# Altium PCB PCB1.PcbDoc (part 5 of 7)
Units mm, origin at the board's own origin, x right, y up, seen from the top; angles counter-clockwise.
Board outline 100 x 100 mm, 6 copper layers (Top, GND_1, Signal, PWR, GND_2, Bottom), stack 0.816 mm thick; 321 components, 260 nets, 1718 pads, 694 vias.
Unrouted connection lines stored in the file: 527.
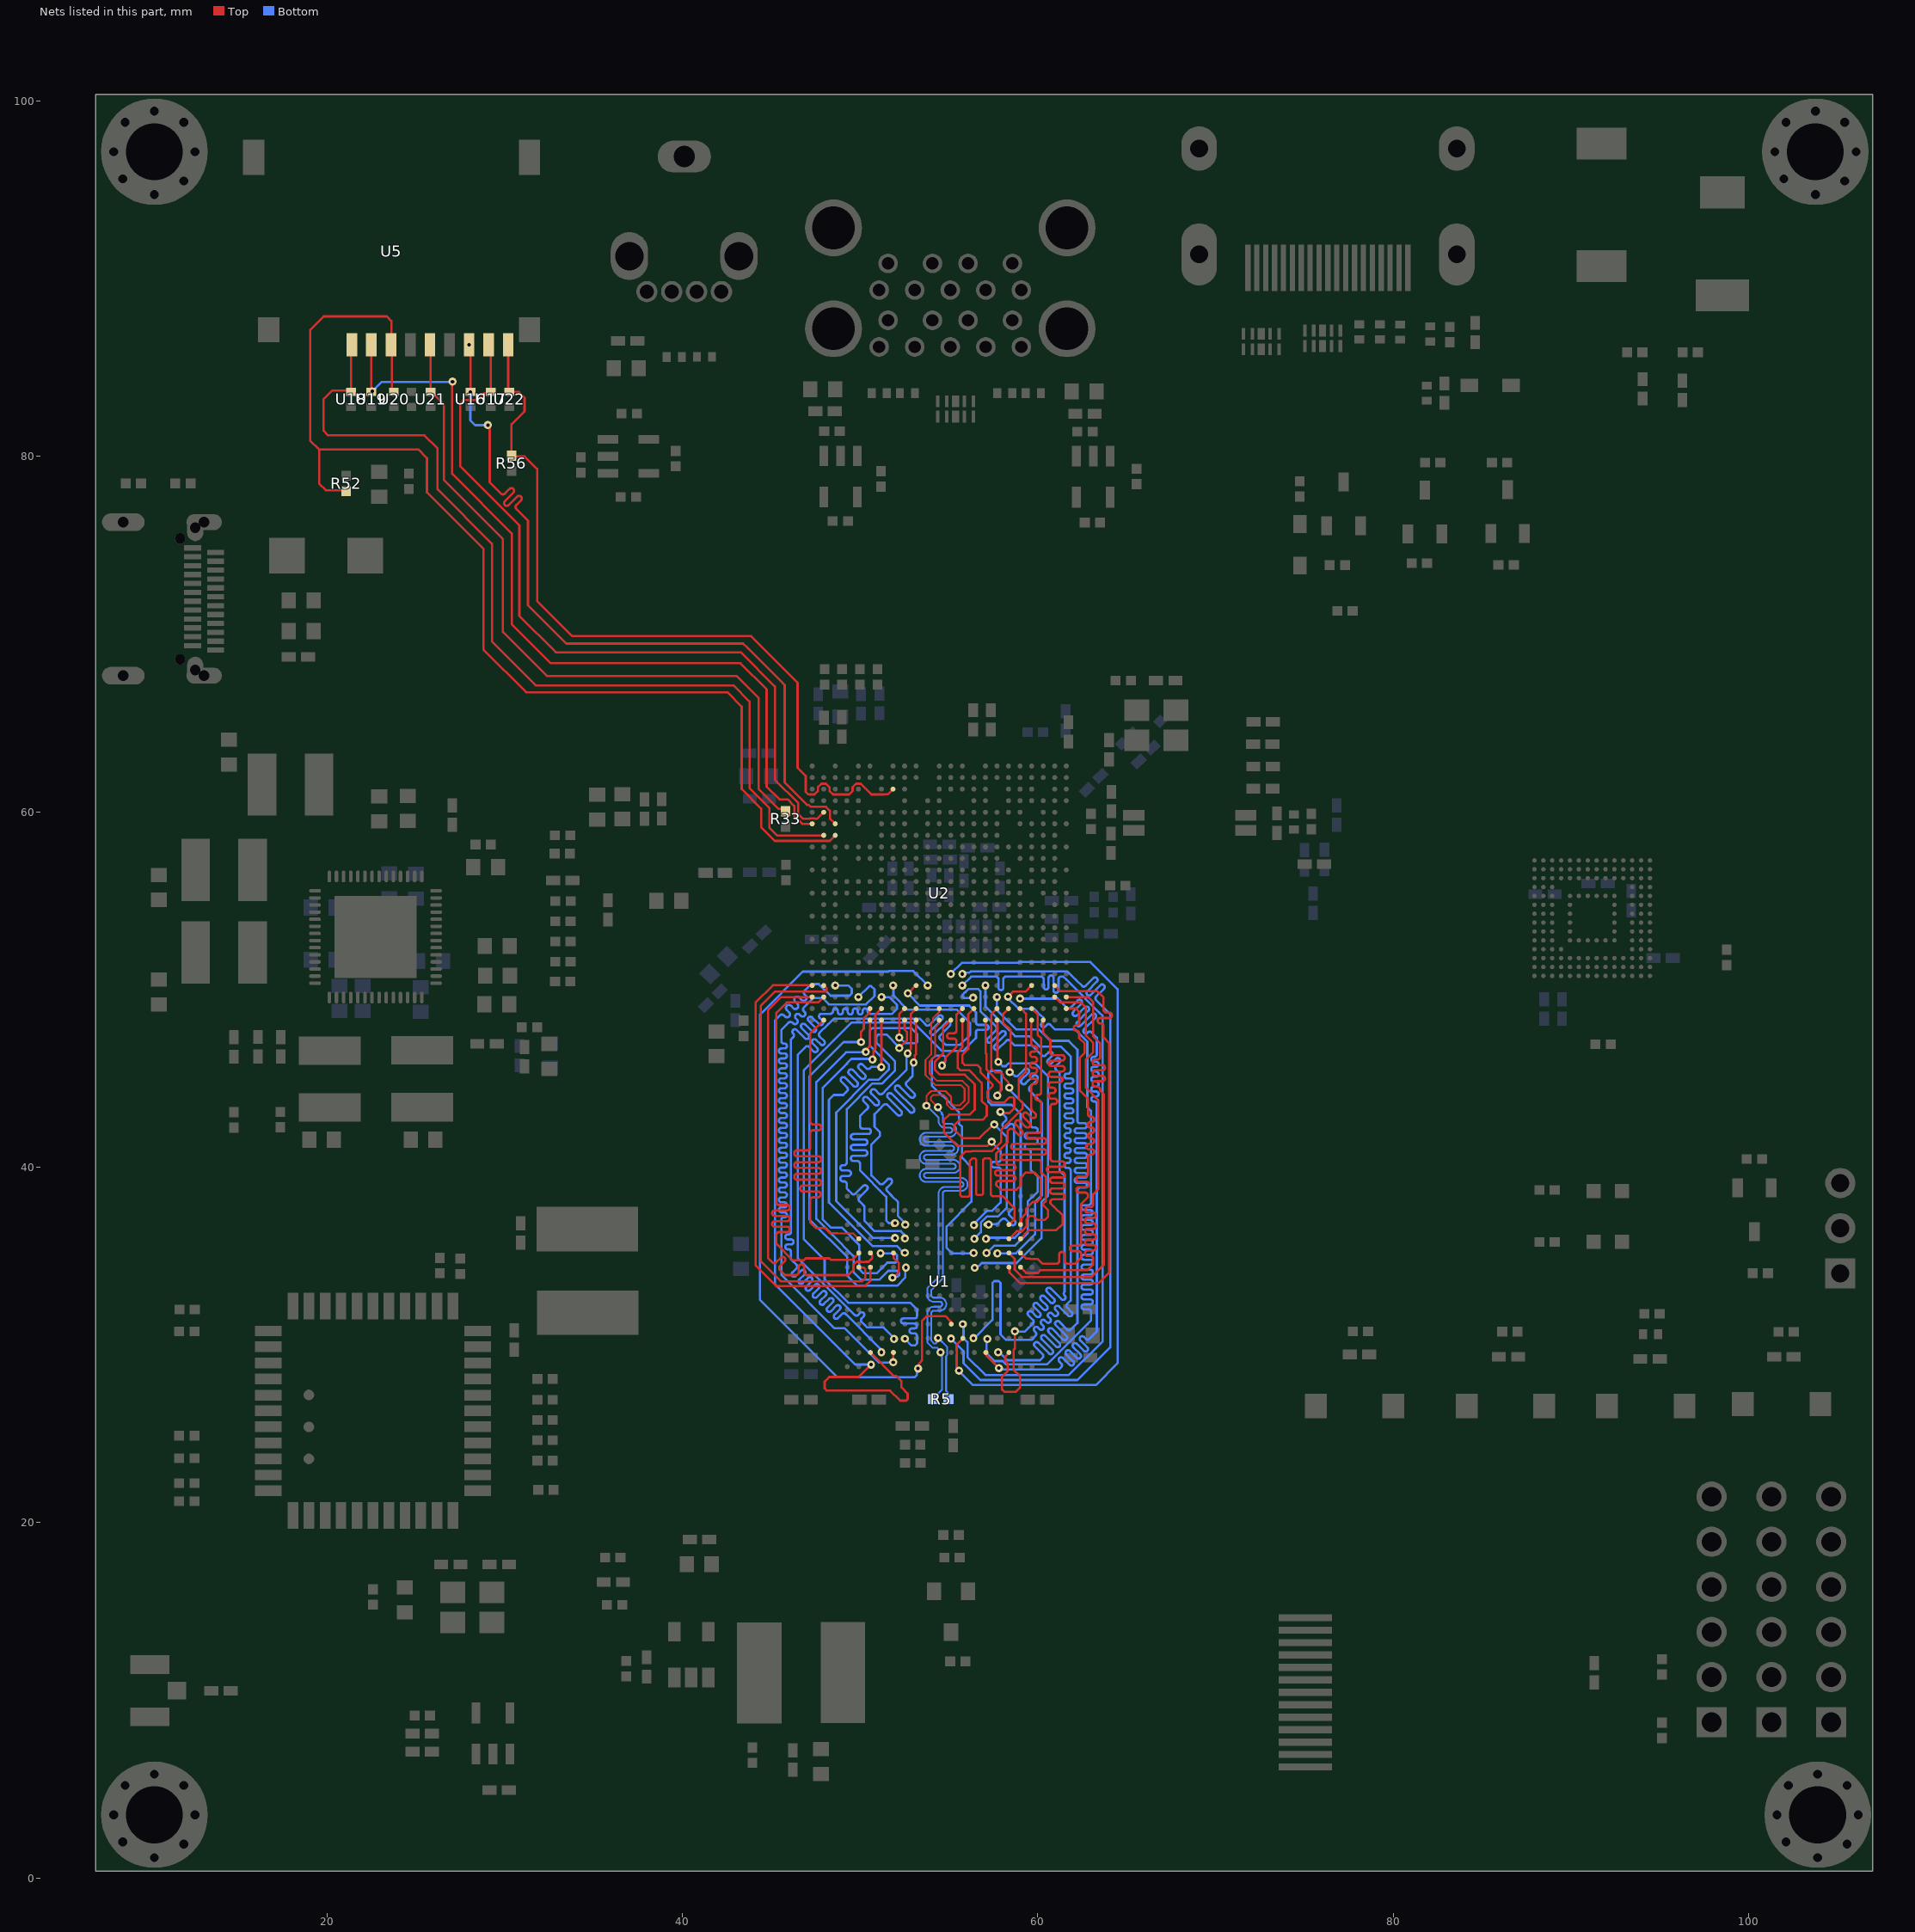
[diagram p8: the nets of this part, all layers, seen from the top]

## Via types
v1: diameter 0.457, hole 0.203, Top to Bottom, tented both sides, 685 vias
v2: diameter 0.61, hole 0.305, Top to Bottom, tented both sides, 9 vias

## Nets (pads, with @x,y where several pads share a name; then routed paths per layer and width w, separated by ;. In a path a pad name is that pad's centre, name@x,y a point inside that pad or via, vN(x,y) a via of type N, cw(c..) or ccw(c..) an arc to the next point about the centre after c; other vN are vias at no path point) (continued)
SA0: U1.R2 U2.AA15 | length 42.9
  Top w0.127: U1.R2@58.377,29.575 58.377,29.548 58.166,29.337 58.166,29.083 58.293,28.956 58.293,28.52 57.991,28.218 57.991,27.498 58.122,27.366 58.768,27.366 59.008,27.606 59.008,28.241 58.631,28.618 58.631,29.713 58.711,29.793 v1@58.711,30.766
  Bottom w0.127: v1(56.356,49.538) 56.348,49.53 55.841,49.53 55.767,49.604 55.767,49.71 55.897,49.84 55.915,49.84 56.113,50.038 56.642,50.038 56.769,49.911 56.769,48.796 57.011,48.554 57.056,48.509 57.649,47.916 cw(c57.55,47.817) 57.649,47.719 57.174,47.244 ccw(c57.273,47.145) 57.174,47.046 ccw(c57.273,47.145) 57.372,47.046 57.952,47.627 cw(c58.051,47.528) 58.15,47.627 cw(c58.051,47.528) 58.15,47.43 57.569,46.849 ccw(c57.668,46.75) 57.569,46.651 ccw(c57.668,46.75) 57.767,46.651 58.241,47.126 cw(c58.34,47.027) 58.439,47.126 58.702,46.863 59.055,46.863 59.662,46.863 60.185,46.34 60.23,46.295 ccw(c60.329,46.394) 60.427,46.295 60.603,46.471 cw(c60.702,46.372) 60.801,46.471 cw(c60.702,46.372) 60.801,46.273 60.576,46.048 ccw(c60.674,45.949) 60.576,45.85 ccw(c60.674,45.949) 60.773,45.85 61.03,46.107 cw(c61.129,46.008) 61.227,46.107 cw(c61.129,46.008) 61.227,45.909 61.02,45.702 ccw(c61.119,45.603) 61.02,45.505 61.185,45.339 61.23,45.294 ; v1(58.711,30.766) 58.73,30.748 59.257,30.748 59.476,30.966 59.723,31.213 ccw(c59.624,31.312) 59.723,31.411 59.467,31.666 cw(c59.566,31.765) 59.467,31.864 cw(c59.566,31.765) 59.665,31.864 59.92,31.609 ccw(c60.019,31.707) 60.118,31.609 ccw(c60.019,31.707) 60.118,31.806 59.794,32.13 cw(c59.893,32.228) 59.794,32.327 cw(c59.893,32.228) 59.992,32.327 60.315,32.004 ccw(c60.414,32.103) 60.513,32.004 ccw(c60.414,32.103) 60.513,32.201 60.176,32.538 cw(c60.275,32.637) 60.176,32.735 cw(c60.275,32.637) 60.374,32.735 60.711,32.399 ccw(c60.809,32.498) 60.908,32.399 ccw(c60.809,32.498) 60.908,32.596 60.524,32.981 cw(c60.623,33.08) 60.524,33.178 cw(c60.623,33.08) 60.721,33.178 61.324,32.576 ccw(c61.423,32.674) 61.522,32.576 ccw(c61.423,32.674) 61.522,32.773 61.501,32.794 cw(c61.6,32.893) 61.501,32.992 61.505,32.996 61.505,33.077 61.505,39.524 61.232,39.797 61.232,45.292
SA1: U1.P2 U2.AA17 | length 42.4
  Bottom w0.127: v1(57.703,49.582) 57.703,48.845 58.796,47.752 60.071,47.752 60.706,47.117 60.861,47.117 61.733,47.117 61.794,47.056 62.23,46.62 62.23,43.307 62.23,42.618 ccw(c62.37,42.618) 62.37,42.478 62.625,42.478 cw(c62.625,42.338) 62.625,42.198 62.214,42.198 ccw(c62.214,42.059) 62.214,41.919 62.625,41.919 cw(c62.625,41.779) 62.625,41.64 62.214,41.64 ccw(c62.214,41.5) 62.214,41.36 62.625,41.36 cw(c62.625,41.221) 62.625,41.081 62.214,41.081 ccw(c62.214,40.941) 62.214,40.801 62.625,40.801 cw(c62.625,40.662) 62.625,40.522 62.214,40.522 ccw(c62.214,40.382) 62.214,40.243 62.625,40.243 cw(c62.625,40.103) 62.625,39.963 62.214,39.963 ccw(c62.214,39.824) 62.214,39.684 62.625,39.684 cw(c62.625,39.544) 62.625,39.404 62.214,39.404 ccw(c62.214,39.265) 62.214,39.125 62.625,39.125 cw(c62.625,38.985) 62.625,38.846 62.37,38.846 ccw(c62.37,38.706) 62.23,38.706 62.23,38.363 62.23,31.242 62.222,31.234 61.851,30.863 cw(c61.753,30.962) 61.654,30.863 61.212,31.306 ccw(c61.113,31.207) 61.014,31.306 ccw(c61.113,31.207) 61.014,31.108 61.613,30.509 cw(c61.514,30.41) 61.613,30.311 cw(c61.514,30.41) 61.416,30.311 60.817,30.911 ccw(c60.718,30.812) 60.619,30.911 ccw(c60.718,30.812) 60.619,30.713 61.218,30.114 cw(c61.119,30.015) 61.218,29.916 cw(c61.119,30.015) 61.021,29.916 60.421,30.515 ccw(c60.323,30.417) 60.224,30.515 ccw(c60.323,30.417) 60.224,30.318 60.823,29.719 cw(c60.724,29.62) 60.823,29.521 cw(c60.724,29.62) 60.625,29.521 60.026,30.12 ccw(c59.928,30.022) 59.829,30.12 ccw(c59.928,30.022) 59.829,29.923 60.271,29.481 cw(c60.172,29.382) 60.271,29.283 60.226,29.238 60.126,29.138 59.436,29.138 58.293,29.138 57.839,29.591 v1(57.771,29.591)
SA2: U1.N2 U2.AA19 | length 42.7
  Top w0.127: U1.N2@57.09,29.566 57.109,29.547 57.109,29.396 v1(57.806,28.698)
  Bottom w0.127: v1(57.806,28.698) 57.87,28.635 58.023,28.635 58.046,28.612 61.173,28.612 61.277,28.716 61.322,28.761 ccw(c61.223,28.86) 61.322,28.958 61.211,29.069 cw(c61.31,29.168) 61.211,29.267 cw(c61.31,29.168) 61.408,29.267 61.797,28.879 ccw(c61.896,28.977) 61.994,28.879 ccw(c61.896,28.977) 61.994,29.076 61.606,29.465 cw(c61.705,29.563) 61.606,29.662 cw(c61.705,29.563) 61.804,29.662 62.192,29.274 ccw(c62.291,29.373) 62.389,29.274 ccw(c62.291,29.373) 62.389,29.471 62.001,29.86 cw(c62.1,29.959) 62.001,30.057 cw(c62.1,29.959) 62.199,30.057 62.587,29.669 ccw(c62.686,29.768) 62.785,29.669 ccw(c62.686,29.768) 62.785,29.867 62.396,30.255 cw(c62.495,30.354) 62.396,30.452 cw(c62.495,30.354) 62.594,30.452 ; v1(58.997,49.49) 61.127,49.49 61.224,49.393 61.269,49.348 61.637,48.98 ccw(c61.736,49.078) 61.835,48.98 62.253,49.397 cw(c62.352,49.299) 62.45,49.397 cw(c62.352,49.299) 62.45,49.2 62.001,48.751 ccw(c62.1,48.652) 62.001,48.553 ccw(c62.1,48.652) 62.199,48.553 62.648,49.002 cw(c62.747,48.903) 62.845,49.002 cw(c62.747,48.903) 62.845,48.805 62.207,48.166 ccw(c62.306,48.068) 62.207,47.969 ccw(c62.306,48.068) 62.405,47.969 63.043,48.607 cw(c63.142,48.508) 63.241,48.607 cw(c63.142,48.508) 63.241,48.409 62.602,47.771 ccw(c62.701,47.672) 62.602,47.574 ccw(c62.701,47.672) 62.8,47.574 62.823,47.597 cw(c62.922,47.498) 63.02,47.597 63.065,47.552 63.321,47.296 63.321,46.702 63.321,46.359 cw(c63.182,46.359) 63.182,46.219 63.152,46.219 ccw(c63.152,46.08) 63.152,45.94 63.285,45.94 cw(c63.285,45.8) 63.285,45.661 63.152,45.661 ccw(c63.152,45.521) 63.152,45.381 63.285,45.381 cw(c63.285,45.241) 63.285,45.102 63.152,45.102 ccw(c63.152,44.962) 63.152,44.822 63.285,44.822 cw(c63.285,44.683) 63.285,44.543 63.152,44.543 ccw(c63.152,44.403) 63.152,44.264 63.285,44.264 cw(c63.285,44.124) 63.285,43.984 63.152,43.984 ccw(c63.152,43.844) 63.152,43.705 63.182,43.705 cw(c63.182,43.565) 63.321,43.565 63.321,43.18 63.321,30.76 63.193,30.632 ; 62.594,30.452 62.705,30.341 ccw(c62.804,30.44) 62.902,30.341 63.193,30.632 ; 63.193,30.66 63.193,30.632
SA3: U1.N3 U2.Y20 | length 42.7
  Top w0.127: v1(58.32,49.604) 58.32,49.61 58.595,49.886 59.129,49.886 59.131,49.884 59.304,49.884 U2.Y20@59.653,50.232
  Bottom w0.127: v1(57.161,30.339) 57.118,30.296 57.118,29.524 57.552,29.09 58.019,29.09 58.199,28.911 60.533,28.911 62.786,31.163 62.992,31.369 62.992,31.579 62.992,31.864 ccw(c62.852,31.864) 62.852,32.004 62.597,32.004 cw(c62.597,32.144) 62.597,32.283 62.955,32.283 ccw(c62.955,32.423) 62.955,32.563 62.597,32.563 cw(c62.597,32.702) 62.597,32.842 62.955,32.842 ccw(c62.955,32.982) 62.955,33.122 62.597,33.122 cw(c62.597,33.261) 62.597,33.401 62.955,33.401 ccw(c62.955,33.541) 62.955,33.68 62.597,33.68 cw(c62.597,33.82) 62.597,33.96 62.955,33.96 ccw(c62.955,34.099) 62.955,34.239 62.597,34.239 cw(c62.597,34.379) 62.597,34.519 62.955,34.519 ccw(c62.955,34.658) 62.955,34.798 62.597,34.798 cw(c62.597,34.938) 62.597,35.077 62.955,35.077 ccw(c62.955,35.217) 62.955,35.357 62.597,35.357 cw(c62.597,35.496) 62.597,35.636 62.955,35.636 ccw(c62.955,35.776) 62.955,35.916 62.597,35.916 cw(c62.597,36.055) 62.597,36.195 62.955,36.195 ccw(c62.955,36.335) 62.955,36.474 62.597,36.474 cw(c62.597,36.614) 62.597,36.754 62.955,36.754 ccw(c62.955,36.893) 62.955,37.033 62.597,37.033 cw(c62.597,37.173) 62.597,37.313 62.955,37.313 ccw(c62.955,37.452) 62.955,37.592 62.597,37.592 cw(c62.597,37.732) 62.597,37.871 62.852,37.871 ccw(c62.852,38.011) 62.992,38.011 62.992,38.354 62.992,43.18 62.786,43.386 62.786,47.069 62.103,47.752 62.066,47.752 60.96,47.752 60.96,47.766 60.751,47.974 60.707,48.019 ccw(c60.608,47.921) 60.509,48.019 60.416,47.926 cw(c60.317,48.025) 60.218,47.926 cw(c60.317,48.025) 60.218,48.124 60.311,48.217 ccw(c60.213,48.316) 60.311,48.414 60.17,48.556 60.157,48.556 59.966,48.746 59.927,48.785 59.927,48.797 59.927,48.799 59.799,48.927 58.915,48.927 58.32,49.522 v1(58.32,49.604)
SA4: U1.M3 U2.Y16 | length 42.4
  Bottom w0.127: v1(56.377,30.381) 56.428,30.381 57.45,31.404 57.45,33.486 57.555,33.591 57.798,33.591 57.902,33.487 57.902,30.597 58.21,30.289 59.636,30.289 59.827,30.48 59.872,30.525 ccw(c59.773,30.624) 59.872,30.723 59.811,30.783 cw(c59.91,30.882) 59.811,30.981 cw(c59.91,30.882) 60.009,30.981 60.098,30.892 ccw(c60.197,30.991) 60.295,30.892 ccw(c60.197,30.991) 60.295,31.09 60.206,31.179 cw(c60.305,31.277) 60.206,31.376 cw(c60.305,31.277) 60.404,31.376 60.492,31.288 ccw(c60.591,31.387) 60.69,31.288 ccw(c60.591,31.387) 60.69,31.485 60.602,31.574 cw(c60.7,31.673) 60.602,31.771 cw(c60.7,31.673) 60.799,31.771 60.904,31.666 ccw(c61.003,31.765) 61.102,31.666 ccw(c61.003,31.765) 61.102,31.864 60.997,31.969 cw(c61.096,32.068) 60.997,32.166 cw(c61.096,32.068) 61.194,32.166 61.707,31.654 ccw(c61.805,31.753) 61.904,31.654 ccw(c61.805,31.753) 61.904,31.852 61.65,32.106 cw(c61.749,32.204) 61.65,32.303 61.847,32.5 61.847,32.641 61.847,39.762 61.847,39.825 ccw(c61.708,39.825) 61.708,39.965 61.64,39.965 cw(c61.64,40.105) 61.64,40.244 61.708,40.244 ccw(c61.708,40.384) 61.708,40.524 61.64,40.524 cw(c61.64,40.663) 61.64,40.803 61.708,40.803 ccw(c61.708,40.943) 61.708,41.082 61.64,41.082 cw(c61.64,41.222) 61.64,41.362 61.708,41.362 ccw(c61.708,41.502) 61.708,41.641 61.64,41.641 cw(c61.64,41.781) 61.64,41.921 61.708,41.921 ccw(c61.708,42.06) 61.708,42.2 61.64,42.2 cw(c61.64,42.34) 61.64,42.479 61.863,42.479 ccw(c61.863,42.619) 61.863,42.759 61.64,42.759 cw(c61.64,42.899) 61.64,43.038 61.863,43.038 ccw(c61.863,43.178) 61.863,43.318 61.64,43.318 cw(c61.64,43.457) 61.64,43.597 61.863,43.597 ccw(c61.863,43.737) 61.863,43.876 61.64,43.876 cw(c61.64,44.016) 61.64,44.156 61.863,44.156 ccw(c61.863,44.296) 61.863,44.435 61.64,44.435 cw(c61.64,44.575) 61.64,44.715 61.863,44.715 ccw(c61.863,44.854) 61.863,44.994 61.64,44.994 cw(c61.64,45.134) 61.64,45.273 61.708,45.273 ccw(c61.708,45.413) 61.847,45.413 61.847,45.889 61.847,46.241 61.292,46.796 60.102,46.796 59.524,47.374 58.724,47.374 57.053,49.045 v1(57.053,50.232)
SA5: U1.F3 U2.Y10 | length 42.4
  Top w0.127: v1(52.688,49.788) 52.698,49.788 53.143,50.232 U2.Y10@53.153,50.232
  Bottom w0.127: v1(52.527,30.349) v1(52.527,30.349) 52.904,29.972 53.086,29.972 53.204,30.09 53.204,30.449 53.204,30.513 ccw(c53.064,30.513) 53.064,30.652 52.918,30.652 cw(c52.918,30.792) 52.918,30.932 53.064,30.932 ccw(c53.064,31.071) 53.064,31.211 52.438,31.211 cw(c52.438,31.351) 52.438,31.491 53.064,31.491 ccw(c53.064,31.63) 53.204,31.63 53.204,31.857 53.204,32.004 52.839,32.369 50.63,32.369 50.624,32.374 49.329,32.374 48.006,33.697 48.006,34.79 46.828,35.967 46.828,45.45 49.515,48.137 53.024,48.137 54.616,46.545 55.79,46.545 56.497,47.252 56.518,47.274 56.518,47.595 cw(c56.658,47.595) 56.658,47.735 57.09,47.735 ccw(c57.09,47.874) 57.09,48.014 56.658,48.014 cw(c56.658,48.154) 56.518,48.154 56.518,48.613 56.518,48.725 56.144,49.1 53.357,49.1 52.688,49.769 v1(52.688,49.788)
SA6: U1.E3 U2.Y8 | length 43
  Bottom w0.127: v1(51.853,50.232) 51.873,50.212 51.873,49.67 52.675,48.867 55.45,48.867 56.198,48.119 56.198,47.467 55.624,46.893 54.885,46.893 54.824,46.893 54.809,46.907 54.497,47.22 cw(c54.595,47.319) 54.497,47.418 55.041,47.962 ccw(c54.942,48.061) 55.041,48.159 ccw(c54.942,48.061) 54.843,48.159 54.182,47.498 cw(c54.083,47.597) 53.984,47.498 cw(c54.083,47.597) 53.984,47.696 54.606,48.317 ccw(c54.507,48.416) 54.606,48.515 ccw(c54.507,48.416) 54.408,48.515 53.904,48.011 cw(c53.805,48.109) 53.706,48.011 53.661,48.055 53.345,48.372 48.527,48.372 48.195,48.039 47.721,47.565 ccw(c47.82,47.466) 47.721,47.368 47.974,47.114 cw(c47.875,47.015) 47.974,46.917 cw(c47.875,47.015) 47.777,46.917 47.523,47.17 ccw(c47.424,47.071) 47.326,47.17 ccw(c47.424,47.071) 47.326,46.973 47.579,46.719 cw(c47.48,46.62) 47.579,46.522 cw(c47.48,46.62) 47.381,46.522 47.128,46.775 ccw(c47.029,46.676) 46.93,46.775 46.688,46.533 46.485,46.329 46.485,34.897 49.456,31.925 49.501,31.88 49.691,31.691 ccw(c49.79,31.789) 49.889,31.691 49.998,31.8 cw(c50.097,31.701) 50.196,31.8 cw(c50.097,31.701) 50.196,31.603 50.086,31.493 ccw(c50.185,31.394) 50.086,31.296 50.284,31.098 50.329,31.053 50.396,30.986 51.326,30.986 51.905,30.407 v1(51.905,30.338)
SA7: U1.E2 U2.AA5 | length 43.3
  Top w0.127: v1(51.86,29.024) 51.869,29.032 51.869,29.552 U1.E2@51.882,29.566
  Bottom w0.127: v1(49.903,49.582) 50.52,50.199 50.625,50.199 50.811,50.013 50.811,49.908 50.811,49.64 50.333,49.162 48.247,49.162 47.879,49.53 47.367,49.53 47.103,49.266 46.836,49 ccw(c46.944,48.892) 46.836,48.784 46.876,48.744 cw(c46.768,48.637) 46.876,48.529 cw(c46.768,48.637) 46.661,48.529 46.6,48.589 ccw(c46.493,48.481) 46.385,48.589 ccw(c46.493,48.481) 46.385,48.373 46.445,48.313 cw(c46.337,48.205) 46.445,48.098 cw(c46.337,48.205) 46.23,48.098 46.19,48.138 ccw(c46.082,48.03) 45.974,48.138 45.714,47.877 45.564,47.728 45.564,47.371 45.564,47.104 ccw(c45.704,47.104) 45.704,46.965 45.742,46.965 cw(c45.742,46.825) 45.742,46.685 45.569,46.685 ccw(c45.569,46.546) 45.569,46.406 45.742,46.406 cw(c45.742,46.266) 45.742,46.126 45.569,46.126 ccw(c45.569,45.987) 45.569,45.847 45.742,45.847 cw(c45.742,45.707) 45.742,45.568 45.569,45.568 ccw(c45.569,45.428) 45.569,45.288 45.742,45.288 cw(c45.742,45.149) 45.742,45.009 45.569,45.009 ccw(c45.569,44.869) 45.569,44.729 45.742,44.729 cw(c45.742,44.59) 45.742,44.45 45.569,44.45 ccw(c45.569,44.31) 45.569,44.171 45.742,44.171 cw(c45.742,44.031) 45.742,43.891 45.569,43.891 ccw(c45.569,43.752) 45.569,43.612 45.742,43.612 cw(c45.742,43.472) 45.742,43.332 45.569,43.332 ccw(c45.569,43.193) 45.569,43.053 45.742,43.053 cw(c45.742,42.913) 45.742,42.774 45.569,42.774 ccw(c45.569,42.634) 45.569,42.494 45.742,42.494 cw(c45.742,42.355) 45.742,42.215 45.569,42.215 ccw(c45.569,42.075) 45.569,41.935 45.742,41.935 cw(c45.742,41.796) 45.742,41.656 45.569,41.656 ccw(c45.569,41.516) 45.569,41.377 45.742,41.377 cw(c45.742,41.237) 45.742,41.097 45.569,41.097 ccw(c45.569,40.958) 45.569,40.818 45.742,40.818 cw(c45.742,40.678) 45.742,40.538 45.569,40.538 ccw(c45.569,40.399) 45.569,40.259 45.742,40.259 cw(c45.742,40.119) 45.742,39.98 45.569,39.98 ccw(c45.569,39.84) 45.569,39.7 45.742,39.7 cw(c45.742,39.561) 45.742,39.421 45.569,39.421 ccw(c45.569,39.281) 45.569,39.141 45.742,39.141 cw(c45.742,39.002) 45.742,38.862 45.569,38.862 ccw(c45.569,38.722) 45.569,38.583 45.742,38.583 cw(c45.742,38.443) 45.742,38.303 45.569,38.303 ccw(c45.569,38.164) 45.569,38.024 45.742,38.024 cw(c45.742,37.884) 45.742,37.744 45.569,37.744 ccw(c45.569,37.605) 45.569,37.465 45.742,37.465 cw(c45.742,37.325) 45.742,37.186 45.704,37.186 ccw(c45.704,37.046) 45.564,37.046 45.564,36.703 45.564,33.943 48.569,30.939 49.13,30.939 51.058,29.011 51.847,29.011 v1(51.86,29.024)
SA8: U1.D2 U2.AA7 | length 42.6
  Bottom w0.127: v1@51.165,49.544 v1(51.203,49.582) 51.637,49.582 52.07,49.149 52.07,48.916 51.793,48.638 51.181,48.638 50.565,48.638 cw(c50.565,48.778) 50.426,48.778 50.426,48.795 ccw(c50.286,48.795) 50.146,48.795 50.146,48.738 cw(c50.006,48.738) 49.867,48.738 49.867,48.795 ccw(c49.727,48.795) 49.587,48.795 49.587,48.738 cw(c49.448,48.738) 49.308,48.738 49.308,48.795 ccw(c49.168,48.795) 49.029,48.795 49.029,48.738 cw(c48.889,48.738) 48.749,48.738 48.749,48.795 ccw(c48.609,48.795) 48.47,48.795 48.47,48.778 cw(c48.33,48.778) 48.33,48.638 48.267,48.638 48.23,48.638 47.829,48.638 ccw(c47.829,48.499) 47.73,48.4 47.884,48.247 cw(c47.785,48.148) 47.884,48.049 cw(c47.785,48.148) 47.686,48.049 47.301,48.435 ccw(c47.202,48.336) 47.103,48.435 ccw(c47.202,48.336) 47.103,48.237 47.488,47.852 cw(c47.39,47.753) 47.488,47.654 cw(c47.39,47.753) 47.291,47.654 46.905,48.039 ccw(c46.807,47.941) 46.708,48.039 ccw(c46.807,47.941) 46.708,47.842 47.093,47.456 cw(c46.994,47.358) 47.093,47.259 cw(c46.994,47.358) 46.896,47.259 46.427,47.727 ccw(c46.328,47.628) 46.23,47.727 ccw(c46.328,47.628) 46.23,47.53 46.24,47.52 cw(c46.141,47.421) 46.24,47.322 46.195,47.277 46.108,47.191 46.108,36.957 46.108,36.36 cw(c45.969,36.36) 45.969,36.22 45.931,36.22 ccw(c45.931,36.081) 45.931,35.941 46.118,35.941 cw(c46.118,35.801) 46.118,35.662 45.931,35.662 ccw(c45.931,35.522) 45.931,35.382 45.969,35.382 cw(c45.969,35.243) 46.108,35.243 46.108,35.179 46.108,34.823 46.208,34.723 46.253,34.678 46.421,34.511 cw(c46.322,34.412) 46.421,34.313 46.186,34.078 ccw(c46.285,33.98) 46.186,33.881 ccw(c46.285,33.98) 46.383,33.881 46.683,34.18 cw(c46.782,34.081) 46.88,34.18 cw(c46.782,34.081) 46.88,33.983 46.581,33.683 ccw(c46.68,33.584) 46.581,33.486 ccw(c46.68,33.584) 46.779,33.486 47.078,33.785 cw(c47.177,33.686) 47.276,33.785 cw(c47.177,33.686) 47.276,33.588 46.976,33.288 ccw(c47.075,33.189) 46.976,33.09 ccw(c47.075,33.189) 47.174,33.09 47.473,33.39 cw(c47.572,33.291) 47.671,33.39 cw(c47.572,33.291) 47.671,33.192 47.371,32.893 ccw(c47.47,32.794) 47.371,32.695 ccw(c47.47,32.794) 47.569,32.695 47.868,32.995 cw(c47.967,32.896) 48.066,32.995 cw(c47.967,32.896) 48.066,32.797 47.766,32.498 ccw(c47.865,32.399) 47.766,32.3 ccw(c47.865,32.399) 47.964,32.3 48.263,32.6 cw(c48.362,32.501) 48.461,32.6 cw(c48.362,32.501) 48.461,32.402 48.161,32.103 ccw(c48.26,32.004) 48.161,31.905 ccw(c48.26,32.004) 48.359,31.905 48.659,32.205 cw(c48.757,32.106) 48.856,32.205 cw(c48.757,32.106) 48.856,32.007 48.557,31.708 ccw(c48.655,31.609) 48.557,31.51 ccw(c48.655,31.609) 48.754,31.51 48.989,31.745 cw(c49.088,31.646) 49.187,31.745 49.231,31.7 51.134,29.797 51.134,29.655 v1(51.197,29.591)
SA9: U1.C2 U2.Y3 | length 42.9
  Top w0.127: U1.C2@50.584,29.566 50.589,29.566 51.905,28.25 52.035,28.25 52.332,27.953 52.332,27.604 52.675,27.261 52.675,26.942 52.601,26.867 52.254,26.867 51.689,27.432 48.133,27.432 48.006,27.559 48.006,27.94 48.26,28.194 49.916,28.194 v1(50.618,28.896) v1@50.599,28.915
  Bottom w0.127: v1(48.603,50.232) 49.336,50.232 49.53,50.038 49.53,49.784 49.403,49.657 48.333,49.657 47.677,50.313 47.253,50.313 47.1,50.16 46.885,49.945 ccw(c47.002,49.828) 46.885,49.712 46.94,49.657 cw(c46.823,49.541) 46.94,49.424 cw(c46.823,49.541) 46.706,49.424 46.573,49.557 ccw(c46.457,49.44) 46.34,49.557 ccw(c46.457,49.44) 46.34,49.323 46.473,49.191 cw(c46.356,49.074) 46.473,48.957 cw(c46.356,49.074) 46.239,48.957 46.106,49.09 ccw(c45.99,48.973) 45.873,49.09 ccw(c45.99,48.973) 45.873,48.856 46.006,48.724 cw(c45.889,48.607) 46.006,48.49 cw(c45.889,48.607) 45.772,48.49 45.718,48.544 ccw(c45.601,48.428) 45.484,48.544 45.206,48.266 45.202,48.262 45.202,33.42 49.727,28.896 v1(50.618,28.896)
SCK_N: R5.2 U1.J2 U2.AB12 | length 42.4
  Top w0.102: v1(53.737,43.464) 53.746,43.474 53.746,44.029 53.88,44.163 54.005,44.288 54.805,44.288 55.118,43.975 55.118,43.623 55.245,43.496 55.619,43.496 55.88,43.757 55.88,44.425 55.671,44.634 55.119,44.634 54.23,44.634 54.163,44.701 53.746,45.118 53.679,45.185 53.679,46.033 54,46.355 54,48.068 54.094,48.161 54.094,48.382 54.453,48.741 U2.AB12@54.453,48.932
  Bottom w0.102: v1(53.737,43.464) 53.743,43.464 54.421,42.786 54.421,42.759 54.421,42.593 ccw(c54.79,42.593) 54.79,42.225 55.046,42.225 cw(c55.046,42.085) 55.186,42.085 cw(c55.046,42.085) 55.046,41.945 53.726,41.945 ccw(c53.726,41.577) 53.357,41.577 ccw(c53.726,41.577) 53.726,41.208 55.154,41.208 cw(c55.154,41.068) 55.293,41.068 cw(c55.154,41.068) 55.154,40.928 53.726,40.928 ccw(c53.726,40.56) 53.357,40.56 ccw(c53.726,40.56) 53.726,40.191 55.242,40.191 cw(c55.242,40.051) 55.381,40.051 cw(c55.242,40.051) 55.242,39.912 53.726,39.912 ccw(c53.726,39.543) 53.357,39.543 ccw(c53.726,39.543) 53.726,39.174 55.678,39.174 cw(c55.678,39.035) 55.818,39.035 cw(c55.678,39.035) 55.678,38.895 54.79,38.895 ccw(c54.79,38.526) 54.421,38.526 54.421,37.603 54.421,33.835 53.78,33.195 53.78,32.966 53.78,32.801 ccw(c54.149,32.801) 54.149,32.432 54.484,32.432 cw(c54.484,32.293) 54.624,32.293 cw(c54.484,32.293) 54.484,32.153 54.149,32.153 ccw(c54.149,31.784) 53.78,31.784 53.78,30.988 53.78,30.143 54.072,29.851 54.334,29.851 54.528,29.657 v1(54.528,29.591) 54.61,29.509 54.61,29.082 54.61,28.473 54.61,27.476 54.337,27.203 54.337,27.169 54.118,26.95 R5.2@54.105,26.95
SCK_P: R5.1 U1.J3 U2.AC12 | length 42.2
  Top w0.102: v1@54.378,43.463 v1(54.378,43.384) 53.975,43.787 53.975,43.934 54.1,44.059 54.71,44.059 54.889,43.88 54.889,43.528 55.15,43.267 55.713,43.267 56.109,43.663 56.109,44.519 55.765,44.863 55.024,44.863 54.324,44.863 53.907,45.28 53.907,45.939 54.229,46.26 54.229,47.867 54.453,48.091 U2.AC12@54.453,48.282
  Bottom w0.102: v1(54.378,43.384) 54.378,43.288 54.598,43.068 54.598,42.994 54.65,42.942 54.65,42.759 54.65,42.593 ccw(c54.79,42.593) 54.79,42.454 55.046,42.454 cw(c55.046,42.085) 55.415,42.085 cw(c55.046,42.085) 55.046,41.716 53.726,41.716 ccw(c53.726,41.577) 53.586,41.577 ccw(c53.726,41.577) 53.726,41.437 55.154,41.437 cw(c55.154,41.068) 55.522,41.068 cw(c55.154,41.068) 55.154,40.699 53.726,40.699 ccw(c53.726,40.56) 53.586,40.56 ccw(c53.726,40.56) 53.726,40.42 55.242,40.42 cw(c55.242,40.051) 55.61,40.051 cw(c55.242,40.051) 55.242,39.683 53.726,39.683 ccw(c53.726,39.543) 53.586,39.543 ccw(c53.726,39.543) 53.726,39.403 55.678,39.403 cw(c55.678,39.035) 56.047,39.035 cw(c55.678,39.035) 55.678,38.666 54.79,38.666 ccw(c54.79,38.526) 54.65,38.526 54.65,37.603 54.65,33.74 54.009,33.1 54.009,32.966 54.009,32.801 ccw(c54.149,32.801) 54.149,32.661 54.484,32.661 cw(c54.484,32.293) 54.853,32.293 cw(c54.484,32.293) 54.484,31.924 54.149,31.924 ccw(c54.149,31.784) 54.009,31.784 54.009,30.988 54.009,30.237 54.167,30.08 54.251,30.08 54.322,30.151 54.322,30.327 v1(54.39,30.395) 54.907,29.878 54.907,29.434 54.839,29.365 54.839,27.409 54.935,27.313 54.935,26.986 R5.1@54.97,26.95 ; R5.1@54.766,27.155 R5.1@54.805,27.115
SCKE0: U1.K3 U2.W14 | length 42.6
  Bottom w0.127: v1(55.118,30.353) 55.819,29.652 55.819,28.975 56.77,28.024 62.233,28.024 64.075,29.867 64.075,48.617 63.521,49.17 63.476,49.215 63.279,49.413 cw(c63.378,49.512) 63.279,49.61 63.721,50.053 ccw(c63.622,50.151) 63.721,50.25 ccw(c63.622,50.151) 63.524,50.25 62.98,49.707 cw(c62.882,49.806) 62.783,49.707 cw(c62.882,49.806) 62.783,49.905 63.326,50.448 ccw(c63.227,50.547) 63.326,50.645 ccw(c63.227,50.547) 63.128,50.645 62.686,50.203 cw(c62.587,50.302) 62.489,50.203 62.184,50.507 62.139,50.552 61.667,51.024 56.224,51.024 56.145,50.945 55.816,50.945 v1(55.753,50.882)
SCKE1: U1.K4 U2.Y11 | length 42.7
  Top w0.127: v1(53.258,28.674) 53.321,28.737 53.321,28.957 53.493,29.129 53.493,31.354 53.765,31.627 54.804,31.627 55.104,31.326 55.104,31.195 U1.K4@55.133,31.166
  Bottom w0.127: v1(53.258,28.674) 53.195,28.611 53.195,28.308 53.07,28.183 48.72,28.183 44.366,32.537 44.366,48.598 46.78,51.012 51.59,51.012 51.626,51.048 52.832,51.048 52.987,51.048 v1(53.803,50.232)
SCS0: U1.L3 U2.W13 | length 43.2
  Top w0.127: v1(55.57,28.556) 55.57,28.603 55.434,28.739 55.434,29.438 55.436,29.44 55.436,29.691 55.434,29.693 55.434,30.017 U1.L3@55.783,30.366
  Bottom w0.127: v1(55.103,50.882) 55.736,51.515 58.915,51.515 58.951,51.551 62.961,51.551 64.493,50.018 64.493,31.683 64.493,30.404 64.493,28.975 63.26,27.742 56.343,27.742 55.57,28.515 v1(55.57,28.556)
SCS1: U1.L4 U2.Y14 | length 42.3
  Bottom w0.127: v1(55.753,50.232) 56.248,50.727 57.301,50.727 57.644,50.727 cw(c57.644,50.588) 57.784,50.588 57.784,50.114 ccw(c57.924,50.114) 58.063,50.114 58.063,50.588 cw(c58.203,50.588) 58.203,50.727 58.801,50.727 59.549,50.727 60.187,50.727 cw(c60.187,50.588) 60.326,50.588 60.326,50.151 ccw(c60.466,50.151) 60.606,50.151 60.606,50.658 cw(c60.745,50.658) 60.885,50.658 60.885,49.962 ccw(c61.025,49.962) 61.165,49.962 61.165,50.588 cw(c61.304,50.588) 61.304,50.727 61.368,50.727 61.441,50.727 61.595,50.574 61.881,50.288 63.449,48.72 63.651,48.517 63.651,30.215 61.743,28.306 57.056,28.306 56.046,29.316 56.046,30.158 55.821,30.383 55.821,31.126 v1(55.775,31.172)
SDC0_CLK: R33.2 U5.5 U21.2 | length 41
  Top w0.127: U5.5@25.795,86.284 25.826,86.253 U21.2@25.826,83.647 25.876,83.647 26.576,82.947 26.576,78.682 29.9,75.357 29.9,70.12 32.369,67.651 36.642,67.651 42.43,67.651 43.045,67.651 44.282,66.415 44.282,61.307 45.419,60.17 45.672,60.17 R33.2@45.805,60.036
SDC0_CMD: R52.1 U2.G3 U5.3 U20.2 | length 65.7
  Top w0.127: R52.1@21.082,78.053 21.03,78.105 19.939,78.105 19.558,78.486 19.558,80.391 19.548,80.401 ; U20.2@23.762,83.647 23.651,83.758 23.651,86.228 U5.3@23.595,86.284 23.622,86.311 23.622,87.63 23.368,87.884 19.812,87.884 19.05,87.122 19.05,80.899 19.548,80.401 ; U2.G3@48.603,58.682 48.287,58.366 45.208,58.366 44.434,59.14 44.434,60.185 43.334,61.285 43.334,65.925 42.531,66.728 31.201,66.728 28.811,69.118 28.811,74.795 25.625,77.981 25.625,79.907 25.131,80.401 19.548,80.401
SDC0_D0: U2.F3 U5.7 U16.2 | length 45.1
  Top w0.127: v1(27.995,86.284) 28.071,86.208 v1(28.071,83.634) ; v1(29.056,81.768) 29.119,81.704 29.119,81.564 29.154,81.528 29.154,78.549 29.745,77.958 29.79,77.913 ccw(c29.898,78.021) 30.006,77.913 30.268,78.175 cw(c30.376,78.068) 30.484,78.175 cw(c30.376,78.068) 30.484,77.96 30.007,77.483 ccw(c30.114,77.375) 30.007,77.267 ccw(c30.114,77.375) 30.222,77.267 30.7,77.744 cw(c30.807,77.637) 30.915,77.744 cw(c30.807,77.637) 30.915,77.529 30.652,77.266 ccw(c30.76,77.158) 30.652,77.051 30.947,76.756 30.992,76.712 31.311,76.392 31.311,71.632 33.471,69.473 43.418,69.473 43.664,69.227 45.651,67.241 45.755,67.136 45.755,66.728 45.755,61.92 45.755,61.657 47.014,60.397 47.108,60.397 47.22,60.285 48.079,60.285 48.3,60.065 48.3,59.635 U2.F3@48.603,59.332
  Bottom w0.127: v1(28.071,83.634) 28.067,83.63 28.067,82.042 28.341,81.768 v1(29.056,81.768)
SDC0_D1: U2.E2 U5.8 U17.2 | length 43.5
  Top w0.127: U5.8@29.095,86.284 29.223,86.156 U17.2@29.223,83.647 29.173,83.647 29.092,83.566 28.829,83.566 28.448,83.185 27.737,83.185 27.686,83.185 27.502,83.001 27.502,79.45 30.829,76.124 30.829,71.032 32.882,68.978 35.994,68.978 40.64,68.978 43.279,68.978 45.204,67.053 45.204,61.809 46.519,60.494 46.519,59.877 46.783,59.613 47.155,59.613 47.177,59.635 47.429,59.635 47.448,59.616 47.587,59.616 U2.E2@47.953,59.982
SDC0_D2: U2.G2 U5.1 U18.2 | length 51.9
  Top w0.127: U5.1@21.395,86.284 21.349,86.238 U18.2@21.349,83.647 21.275,83.72 20.294,83.72 19.801,83.227 19.801,81.466 20.071,81.196 25.484,81.196 26.225,80.455 26.225,78.149 29.281,75.093 29.281,69.588 31.747,67.122 42.864,67.122 43.778,66.208 43.778,61.336 44.89,60.224 44.89,59.115 45.336,58.669 47.941,58.669 U2.G2@47.953,58.682
SDC0_D3: U2.F1 U5.2 U19.2 | length 47.5
  Top w0.127: U5.2@22.495,86.284 22.495,83.723 v1(22.547,83.671) ; v1(27.065,84.214) 27.047,84.196 27.047,79.022 30.395,75.674 30.395,70.568 32.596,68.367 33.273,68.367 36.163,68.367 43.272,68.367 44.74,66.899 44.74,61.422 45.456,60.706 45.921,60.706 46.292,60.334 46.292,59.783 46.744,59.332 U2.F1@47.303,59.332
  Bottom w0.127: v1(22.547,83.671) 23.078,84.202 27.053,84.202 v1(27.065,84.214)
SDC0_DET: R56.1 U2.C8 U5.9 U22.2 | length 45.8
  Top w0.127: U5.9@30.195,86.284 30.195,83.715 U22.2@30.263,83.647 30.775,83.647 31.115,83.307 31.115,82.55 30.387,81.822 R56.1@30.387,80.051 30.428,80.01 31.115,80.01 31.823,79.302 31.823,71.866 33.801,69.889 34.539,69.889 39.497,69.889 43.868,69.889 46.482,67.275 46.482,62.484 46.938,62.028 46.938,61.135 47.081,60.991 47.164,60.991 47.177,60.978 47.429,60.978 47.628,61.178 47.628,61.386 47.827,61.585 48.079,61.585 48.278,61.386 48.278,61.178 48.477,60.978 49.379,60.978 49.578,61.178 49.578,61.386 49.777,61.585 50.029,61.585 50.636,60.978 51.329,60.978 51.342,60.991 51.563,60.991 U2.C8@51.853,61.282
SDQ0: U1.P9 U2.AB18 | length 19.4
  Top w0.127: U2.AB18@58.353,48.932 58.065,48.644 58.065,48.423 58.049,48.408 58.049,48.14 58.475,47.715 58.475,45.406 v1(58.419,45.351)
  Bottom w0.127: v1(57.729,35.154) 58.769,35.154 59.844,36.229 59.844,38.034 60.23,38.42 60.23,43.617 59.805,44.042 59.76,44.087 59.545,44.302 cw(c59.652,44.41) 59.545,44.518 59.952,44.926 ccw(c59.845,45.034) 59.952,45.141 ccw(c59.845,45.034) 59.737,45.141 59.312,44.716 cw(c59.204,44.824) 59.096,44.716 cw(c59.204,44.824) 59.096,44.932 59.463,45.298 ccw(c59.355,45.406) 59.463,45.514 ccw(c59.355,45.406) 59.247,45.514 58.898,45.165 cw(c58.79,45.272) 58.682,45.165 58.512,45.335 58.497,45.351 58.438,45.351 v1(58.419,45.351)
SDQ1: U1.M8 U2.AC17 | length 19.4
  Top w0.127: U2.AC17@57.703,48.282 57.732,48.253 57.732,45.977 v1(57.778,45.931)
  Bottom w0.127: v1(56.448,34.341) 56.537,34.341 56.643,34.447 56.681,34.447 56.842,34.607 58.799,34.607 60.206,36.014 60.206,38.034 60.579,38.407 60.579,45.106 59.837,45.848 58.363,45.848 58.202,45.688 58.018,45.688 57.778,45.927 v1(57.778,45.931)
SDQ2: U1.N9 U2.AB17 | length 19.3
  Top w0.127: 57.375,45.78 57.375,45.562 57.598,45.339 57.912,45.339 58.039,45.212 58.039,45.085 58.35,44.774 58.35,44.615 58.395,44.57 v1(58.395,44.481) ; 57.375,45.781 57.375,48.603 U2.AB17@57.703,48.932
  Bottom w0.127: v1@57.15,35.179 57.56,35.589 58.732,35.589 59.428,36.285 59.428,38.064 59.998,38.634 59.998,39.464 59.604,39.858 59.604,40.799 59.604,40.862 ccw(c59.452,40.862) 59.452,41.015 59.414,41.015 cw(c59.414,41.167) 59.414,41.319 59.85,41.319 ccw(c59.85,41.472) 59.85,41.624 59.414,41.624 cw(c59.414,41.777) 59.414,41.929 59.85,41.929 ccw(c59.85,42.081) 59.85,42.234 59.757,42.234 cw(c59.757,42.386) 59.604,42.386 59.604,42.794 59.604,43.177 58.517,44.264 58.517,44.27 58.395,44.392 v1(58.395,44.481)
  other v1: 57.118,35.179
SDQ3: U1.N10 U2.AC16 | length 19.4
  Top w0.127: U2.AC16@57.053,48.282 57.071,48.264 57.071,46.418 57.106,46.383 57.106,45.51 57.912,44.704 57.912,44.282 57.714,44.084 v1(57.714,44.043)
  Bottom w0.127: v1(57.082,35.979) 57.139,36.036 58.708,36.036 59.035,36.363 59.035,42.997 58.522,43.51 57.387,43.51 57.216,43.681 57.216,45.29 57.348,45.422 57.893,45.422 57.967,45.347 57.967,44.385 57.714,44.132 v1(57.714,44.043)
SDQ4: U1.N11 U2.AB15 | length 19.1
  Top w0.127: U2.AB15@56.403,48.932 56.085,48.614 56.085,46.651 55.767,46.333 55.767,45.879 55.901,45.745 56.611,45.745 56.769,45.587 56.769,45.339 57.446,44.662 57.446,44.557 57.16,44.271 57.16,43.932 57.441,43.651 58.129,43.651 58.42,43.942 58.6,43.942 58.674,43.868 58.674,43.307 58.42,43.053 58.307,43.053 58.305,43.055 57.962,43.055 v1(57.899,43.118)
  Bottom w0.127: v1(57.237,36.771) 57.273,36.807 57.724,36.807 57.984,37.067 cw(c58.092,36.959) 58.2,37.067 58.485,36.782 ccw(c58.592,36.89) 58.7,36.782 ccw(c58.592,36.89) 58.7,36.998 58.415,37.283 cw(c58.523,37.39) 58.415,37.498 58.595,37.678 58.658,37.741 58.658,42.355 58.613,42.4 ccw(c58.506,42.292) 58.398,42.4 58.268,42.27 cw(c58.16,42.378) 58.052,42.27 cw(c58.16,42.378) 58.052,42.485 58.182,42.615 ccw(c58.074,42.723) 58.182,42.831 57.965,43.048 57.92,43.093 57.899,43.114 v1(57.899,43.118)
SDQ5: U1.M9 U2.AB14 | length 19.7
  Top w0.127: v1(54.61,45.727) 54.61,45.817 54.814,46.02 54.814,46.177 55.425,46.789 55.425,47.025 55.425,47.089 ccw(c55.273,47.089) 55.273,47.241 55.047,47.241 cw(c55.047,47.393) 55.047,47.546 55.273,47.546 ccw(c55.273,47.698) 55.425,47.698 55.425,48.184 55.425,48.604 U2.AB14@55.753,48.932
  Bottom w0.127: v1(54.61,45.727) 54.61,45.783 54.794,45.967 54.794,46.199 54.719,46.274 54.243,46.274 54.036,46.067 54.036,44.612 54.63,44.017 54.654,44.017 55.561,43.11 55.561,42.451 55.737,42.276 55.737,40.529 56.261,40.005 56.261,38.06 54.872,36.671 54.872,35.461 55.186,35.147 56.356,35.147 v1(56.388,35.179)
SDQ6: U1.M10 U2.AC14 | length 19.4
  Top w0.127: U2.AC14@55.753,48.282 55.753,46.751 55.499,46.497 55.499,45.593 55.626,45.466 56.134,45.466 56.843,44.757 56.843,43.741 57.125,43.459 57.125,42.901 56.897,42.673 55.604,42.673 55.299,42.369 55.299,42.104 55.764,41.64 56.715,41.64 57.48,42.405 v1(57.553,42.405)
  Bottom w0.127: v1@56.426,35.979 56.795,36.348 56.795,36.883 57.15,37.238 57.772,37.238 58.246,37.711 58.246,41.712 v1(57.553,42.405)
  other v1: 56.428,35.978
SDQ7: U1.M11 U2.AC13 | length 19.6
  Top w0.127: U2.AC13@55.103,48.282 54.668,47.847 54.668,46.396 54.218,45.946 54.218,45.477 54.483,45.212 55.902,45.212 56.451,44.663 56.451,43.243 56.17,42.962 55.012,42.962 54.716,42.666 54.716,41.956 55.468,41.204 57.163,41.204 57.395,41.436 v1(57.402,41.436) 57.36,41.394 v1@57.241,41.394
  Bottom w0.127: v1(56.403,36.744) 56.403,36.812 57.144,37.553 57.448,37.553 57.912,38.017 57.912,39.783 57.912,39.846 ccw(c57.76,39.846) 57.76,39.999 57.53,39.999 cw(c57.53,40.151) 57.53,40.303 57.76,40.303 ccw(c57.76,40.456) 57.912,40.456 57.912,40.901 57.744,41.069 57.402,41.411 v1(57.402,41.436)
SDQ8: U1.R11 U2.AB19 | length 25.7
  Top w0.127: U1.R11@58.382,36.767 58.685,37.07 58.685,37.713 58.022,38.377 57.436,38.377 57.362,38.451 57.362,40.419 57.287,40.493 56.996,40.493 56.921,40.419 56.921,38.51 56.847,38.435 56.6,38.435 56.526,38.51 56.526,40.429 56.452,40.503 56.317,40.503 56.176,40.363 56.176,38.427 56.102,38.353 55.719,38.353 55.634,38.438 55.634,40.593 55.935,40.894 56.268,40.894 56.279,40.906 57.426,40.906 57.945,41.424 57.945,42.104 59.149,43.309 59.149,43.638 58.928,43.859 58.928,44.958 59.338,45.368 59.338,48.649 59.131,48.855 59.121,48.855 59.044,48.932 U2.AB19@59.003,48.932
SDQ9: U1.T11 U2.AC20 | length 26.1
  Top w0.127: U1.T11@59.032,36.767 59.061,36.796 59.061,37.106 59.335,37.38 59.335,37.441 59.335,37.664 59.735,38.064 59.962,38.064 60.156,38.258 60.156,39.364 59.814,39.705 59.33,39.705 59.055,39.43 59.055,38.989 58.801,38.735 57.912,38.735 57.864,38.783 57.658,38.989 57.658,39.075 cw(c57.81,39.075) 57.81,39.227 58.596,39.227 ccw(c58.596,39.38) 58.596,39.532 57.741,39.532 cw(c57.741,39.684) 57.741,39.837 58.596,39.837 ccw(c58.596,39.989) 58.596,40.142 57.81,40.142 cw(c57.81,40.294) 57.658,40.294 57.658,40.551 57.658,40.767 58.293,41.402 58.293,41.807 58.293,42.037 58.384,42.128 cw(c58.492,42.021) 58.6,42.128 58.881,41.847 ccw(c58.989,41.955) 59.097,41.847 ccw(c58.989,41.955) 59.097,42.062 58.768,42.391 cw(c58.876,42.499) 58.768,42.607 cw(c58.876,42.499) 58.984,42.607 59.312,42.278 ccw(c59.42,42.386) 59.528,42.278 ccw(c59.42,42.386) 59.528,42.493 59.199,42.822 cw(c59.307,42.93) 59.199,43.038 cw(c59.307,42.93) 59.415,43.038 59.643,42.809 ccw(c59.751,42.917) 59.858,42.809 ccw(c59.751,42.917) 59.858,43.025 59.678,43.205 cw(c59.786,43.313) 59.633,43.313 59.633,43.872 59.633,44.161 59.633,44.529 cw(c59.786,44.529) 59.786,44.682 59.81,44.682 ccw(c59.81,44.834) 59.81,44.986 59.717,44.986 cw(c59.717,45.139) 59.717,45.291 59.81,45.291 ccw(c59.81,45.444) 59.81,45.596 59.717,45.596 cw(c59.717,45.748) 59.717,45.901 59.81,45.901 ccw(c59.81,46.053) 59.81,46.206 59.717,46.206 cw(c59.717,46.358) 59.717,46.51 59.81,46.51 ccw(c59.81,46.663) 59.81,46.815 59.786,46.815 cw(c59.786,46.968) 59.633,46.968 59.633,47.185 59.633,48.262 U2.AC20@59.653,48.282
SDQ10: U1.T10 U2.AC21 | length 26
  Top w0.127: U1.T10@59.032,35.966 59.032,35.998 59.484,36.45 61.033,36.45 61.404,36.821 61.404,37.283 60.93,37.757 60.706,37.981 60.706,38.049 cw(c60.858,38.049) 60.858,38.202 61.362,38.202 ccw(c61.362,38.354) 61.362,38.506 60.834,38.506 cw(c60.834,38.659) 60.834,38.811 61.362,38.811 ccw(c61.362,38.964) 61.362,39.116 60.834,39.116 cw(c60.834,39.268) 60.834,39.421 61.362,39.421 ccw(c61.362,39.573) 61.362,39.726 60.657,39.726 cw(c60.657,39.878) 60.657,40.03 61.362,40.03 ccw(c61.362,40.183) 61.362,40.335 60.858,40.335 cw(c60.858,40.488) 60.706,40.488 60.706,42.206 60.706,43.042 60.706,43.41 cw(c60.858,43.41) 60.858,43.563 60.941,43.563 ccw(c60.941,43.715) 60.941,43.868 60.759,43.868 cw(c60.759,44.02) 60.759,44.172 60.847,44.172 ccw(c60.847,44.325) 60.847,44.477 60.759,44.477 cw(c60.759,44.63) 60.759,44.782 61.235,44.782 ccw(c61.235,44.934) 61.235,45.087 60.759,45.087 cw(c60.759,45.239) 60.759,45.392 61.362,45.392 ccw(c61.362,45.544) 61.362,45.696 60.759,45.696 cw(c60.759,45.849) 60.759,46.001 61.362,46.001 ccw(c61.362,46.154) 61.362,46.306 60.858,46.306 cw(c60.858,46.458) 60.706,46.458 60.706,46.953 60.706,47.177 60.303,47.58 U2.AC21@60.303,48.282
SDQ11: U1.R10 U2.AB20 | length 25.7
  Top w0.127: U1.R10@58.382,35.966 58.821,36.405 59.1,36.405 59.356,36.662 59.356,37.058 59.558,37.26 59.735,37.26 59.951,37.045 60.413,37.045 60.579,37.211 60.579,37.592 60.314,37.857 60.314,37.962 60.454,38.102 60.454,39.455 60.193,39.716 60.193,40.194 60.193,40.257 ccw(c60.041,40.257) 60.041,40.41 58.079,40.41 cw(c58.079,40.562) 58.079,40.715 60.327,40.715 ccw(c60.327,40.867) 60.327,41.019 58.659,41.019 cw(c58.659,41.172) 58.659,41.324 60.327,41.324 ccw(c60.327,41.477) 60.327,41.629 59.521,41.629 cw(c59.521,41.781) 59.521,41.934 60.041,41.934 ccw(c60.041,42.086) 60.193,42.086 60.193,42.445 60.193,43.216 60.193,43.587 60.19,43.59 60.19,43.622 ccw(c60.037,43.622) 60.037,43.774 60.013,43.774 cw(c60.013,43.927) 60.013,44.079 60.037,44.079 ccw(c60.037,44.232) 60.19,44.232 60.19,45.819 60.19,47.252 59.999,47.443 59.999,48.585 U2.AB20@59.653,48.932
SDQ12: U1.T9 U2.AB23 | length 25.7
  Top w0.127: U1.T9@59.032,35.166 59.335,34.864 59.556,34.864 59.574,34.846 59.983,34.846 60.252,34.577 60.988,34.577 61.052,34.577 ccw(c61.052,34.729) 61.204,34.729 61.204,35.084 cw(c61.357,35.084) 61.509,35.084 61.509,34.729 ccw(c61.661,34.729) 61.661,34.577 61.966,34.577 62.117,34.577 62.43,34.89 62.43,35.069 62.43,35.132 ccw(c62.278,35.132) 62.278,35.285 61.959,35.285 cw(c61.959,35.437) 61.959,35.59 62.278,35.59 ccw(c62.278,35.742) 62.43,35.742 62.43,37.67 62.43,37.93 62.707,38.207 62.819,38.319 62.819,38.423 ccw(c62.667,38.423) 62.667,38.576 62.324,38.576 cw(c62.324,38.728) 62.324,38.88 62.74,38.88 ccw(c62.74,39.033) 62.74,39.185 62.324,39.185 cw(c62.324,39.338) 62.324,39.49 62.667,39.49 ccw(c62.667,39.642) 62.819,39.642 62.819,40.078 62.819,40.194 62.819,40.562 cw(c62.972,40.562) 62.972,40.715 63.025,40.715 ccw(c63.025,40.867) 63.025,41.02 62.874,41.02 cw(c62.874,41.172) 62.874,41.324 63.025,41.324 ccw(c63.025,41.477) 63.025,41.629 62.972,41.629 cw(c62.972,41.782) 62.972,41.934 63.025,41.934 ccw(c63.025,42.086) 63.025,42.239 62.956,42.239 cw(c62.956,42.391) 62.956,42.544 63.025,42.544 ccw(c63.025,42.696) 63.025,42.848 62.972,42.848 cw(c62.972,43.001) 62.819,43.001 62.819,43.406 62.819,43.869 62.357,44.332 62.357,46.161 62.634,46.438 62.634,46.967 62.331,47.27 62.331,47.468 62.331,47.532 ccw(c62.179,47.532) 62.179,47.684 62.171,47.684 cw(c62.171,47.837) 62.171,47.989 62.179,47.989 ccw(c62.179,48.141) 62.331,48.141 62.331,48.371 62.331,48.749 62.148,48.932 U2.AB23@61.603,48.932
SDQ13: U1.R9 U2.AA23 | length 26
  Top w0.127: U1.R9@58.382,35.166 58.696,34.852 58.696,34.238 59.106,33.828 63.033,33.828 63.708,34.502 63.708,44.115 63.5,44.323 63.5,44.387 ccw(c63.348,44.387) 63.348,44.539 63.235,44.539 cw(c63.235,44.691) 63.235,44.844 63.629,44.844 ccw(c63.629,44.996) 63.629,45.149 63.235,45.149 cw(c63.235,45.301) 63.235,45.453 63.629,45.453 ccw(c63.629,45.606) 63.629,45.758 63.235,45.758 cw(c63.235,45.911) 63.235,46.063 63.348,46.063 ccw(c63.348,46.215) 63.5,46.215 63.5,46.579 63.5,46.99 63.119,47.371 63.119,49.302 62.839,49.582 U2.AA23@61.603,49.582
SDQ14: U1.T8 U2.AA22 | length 26.2
  Top w0.127: U1.T8@59.032,34.366 59.344,34.055 59.998,34.055 60.16,34.216 62.793,34.216 63.119,34.543 63.119,34.798 63.119,34.862 ccw(c62.967,34.862) 62.967,35.014 62.809,35.014 cw(c62.809,35.166) 62.809,35.319 63.121,35.319 ccw(c63.121,35.471) 63.121,35.624 62.809,35.624 cw(c62.809,35.776) 62.809,35.928 63.121,35.928 ccw(c63.121,36.081) 63.121,36.233 62.809,36.233 cw(c62.809,36.386) 62.809,36.538 63.121,36.538 ccw(c63.121,36.69) 63.121,36.843 62.809,36.843 cw(c62.809,36.995) 62.809,37.148 63.121,37.148 ccw(c63.121,37.3) 63.121,37.452 62.809,37.452 cw(c62.809,37.605) 62.809,37.757 62.967,37.757 ccw(c62.967,37.91) 63.119,37.91 63.119,38.481 63.404,38.766 63.404,43.784 62.709,44.479 62.709,46.072 63.119,46.482 63.119,46.99 62.709,47.4 62.709,48.985 62.415,49.279 61.257,49.279 U2.AA22@60.953,49.582
SDQ15: U1.R8 U2.Y22 | length 26.3
  Top w0.127: U1.R8@58.382,34.366 58.411,34.337 58.411,34.072 58.994,33.489 63.434,33.489 64.008,34.064 64.008,46.99 63.699,47.299 63.699,47.879 63.699,47.943 ccw(c63.547,47.943) 63.547,48.095 63.516,48.095 cw(c63.516,48.247) 63.516,48.4 64.021,48.4 ccw(c64.021,48.552) 64.021,48.705 63.851,48.705 cw(c63.851,48.857) 63.699,48.857 63.699,49.179 63.699,49.555 63.343,49.911 61.274,49.911 U2.Y22@60.953,50.232
SDQ16: U1.E9 U2.AC6 | length 22.2
  Top w0.127: v1(50.32,46.494) 50.32,46.584 50.553,46.817 U2.AC6@50.553,48.282 ; v1(51.825,33.786) 51.863,33.786 52.185,34.108 52.185,34.603 51.882,34.907 U1.E9@51.882,35.166
  Bottom w0.127: v1(50.32,46.494) 50.297,46.471 49.207,46.471 47.535,44.798 47.535,37.099 48.439,36.195 48.443,36.195 49.631,35.006 49.631,34.095 50.046,33.681 51.093,33.681 51.585,34.173 52.06,34.173 52.197,34.036 52.197,33.927 52.123,33.852 52.064,33.852 52.061,33.849 51.888,33.849 v1(51.825,33.786) v1@51.799,33.812
SDQ17: U1.F8 U2.AB6 | length 22.2
  Top w0.127: v1@50.053,47.051 50.053,47.632 50.207,47.786 50.207,48.364 50.524,48.682 50.524,48.903 U2.AB6@50.553,48.932
  Bottom w0.127: v1(50.059,47.045) 49.074,47.045 47.137,45.109 47.137,37.076 49.276,34.937 49.276,33.894 49.833,33.338 52.082,33.338 52.549,33.805 52.549,34.325 v1(52.577,34.353)
SDQ18: U1.F9 U2.AC7 | length 21.7
  Top w0.127: v1(51.196,45.639) 51.2,45.643 51.2,48.279 U2.AC7@51.203,48.282
  Bottom w0.127: v1(51.196,45.639) 51.184,45.652 51.042,45.652 50.633,45.652 50.558,45.577 cw(c50.451,45.685) 50.343,45.577 50.152,45.768 ccw(c50.044,45.66) 49.937,45.768 ccw(c50.044,45.66) 49.937,45.552 50.262,45.226 cw(c50.155,45.119) 50.262,45.011 cw(c50.155,45.119) 50.047,45.011 49.595,45.462 ccw(c49.488,45.355) 49.38,45.462 ccw(c49.488,45.355) 49.38,45.247 49.831,44.795 cw(c49.724,44.687) 49.831,44.58 cw(c49.724,44.687) 49.616,44.58 49.164,45.031 ccw(c49.057,44.924) 48.949,45.031 ccw(c49.057,44.924) 48.949,44.816 49.265,44.499 cw(c49.157,44.391) 49.265,44.284 49.22,44.239 49.051,44.069 48.514,44.069 48.248,43.803 48.248,38.013 50.694,35.567 52.063,35.567 52.441,35.189 v1(52.514,35.189)
SDQ19: U1.D9 U2.AB7 | length 21.8
  Top w0.127: v1(50.693,46.067) 50.744,46.118 50.744,46.55 50.844,46.649 50.844,46.662 50.861,46.68 50.861,48.59 U2.AB7@51.203,48.932
  Bottom w0.127: v1(50.693,46.067) 50.658,46.102 49.516,46.102 49.262,45.848 49.262,45.828 49.07,45.635 49.067,45.635 47.888,44.456 47.888,37.071 48.352,36.608 48.98,36.608 49.952,35.636 49.952,34.267 50.185,34.035 50.926,34.035 51.526,34.635 51.999,34.635 52.073,34.709 52.073,35.049 51.961,35.161 v1(51.15,35.161)
SDQ20: U1.F10 U2.AC9 | length 21.9
  Top w0.127: v1(52.202,46.708) 52.63,47.136 52.63,47.62 52.503,47.746 U2.AC9@52.503,48.282
  Bottom w0.127: v1(52.202,46.708) 52.202,46.751 51.477,47.475 51.031,47.475 50.927,47.371 50.927,46.99 51.965,45.952 51.965,45.444 51.308,44.786 51.308,44.778 51.234,44.704 50.673,44.704 49.251,43.282 49.251,40.659 49.251,40.272 cw(c49.098,40.272) 49.098,40.119 49.038,40.119 ccw(c49.038,39.967) 49.038,39.815 49.336,39.815 cw(c49.336,39.662) 49.336,39.51 49.038,39.51 ccw(c49.038,39.357) 49.038,39.205 49.098,39.205 cw(c49.098,39.053) 49.251,39.053 49.251,38.989 49.251,38.798 49.34,38.708 49.385,38.663 49.528,38.52 ccw(c49.636,38.628) 49.744,38.52 50.168,38.945 cw(c50.276,38.837) 50.383,38.945 cw(c50.276,38.837) 50.383,38.729 49.959,38.305 ccw(c50.067,38.197) 49.959,38.089 50.175,37.874 50.22,37.829 50.237,37.811 50.237,36.992 50.82,36.409 52.288,36.409 52.464,36.233 52.464,36.055 v1(52.527,35.992)
SDQ21: U1.E10 U2.AB9 | length 22
  Top w0.127: v1(52.207,47.3) 52.197,47.31 52.197,48.626 U2.AB9@52.503,48.932
  Bottom w0.127: v1(51.97,36.017) 51.965,36.022 50.736,36.022 48.659,38.1 48.659,43.086 50.504,44.931 51.042,44.931 51.631,45.519 51.631,45.769 50.552,46.848 50.552,47.692 50.695,47.835 52.876,47.835 53.213,47.498 53.213,47.061 53.139,46.986 52.52,46.986 v1(52.207,47.3)
SDQ22: U1.F11 U2.AC10 | length 21.8
  Top w0.127: v1(53.012,45.893) 53.076,45.956 53.076,46.3 53.15,46.375 53.15,48.279 U2.AC10@53.153,48.282
  Bottom w0.127: v1(52.541,36.768) 52.541,36.841 52.132,37.251 52.132,38.039 51.783,38.388 51.738,38.433 51.702,38.469 51.702,38.48 51.529,38.654 cw(c51.636,38.762) 51.529,38.87 51.754,39.095 ccw(c51.647,39.203) 51.754,39.311 ccw(c51.647,39.203) 51.539,39.311 51.313,39.085 cw(c51.205,39.193) 51.098,39.085 50.976,39.207 50.931,39.252 50.637,39.546 50.637,41.279 51.109,41.751 51.109,41.982 50.809,42.282 50.809,42.99 51.066,43.247 51.327,43.508 cw(c51.434,43.4) 51.542,43.508 52.096,42.953 ccw(c52.204,43.061) 52.312,42.953 ccw(c52.204,43.061) 52.312,43.169 51.567,43.914 cw(c51.675,44.021) 51.567,44.129 cw(c51.675,44.021) 51.783,44.129 52.795,43.117 ccw(c52.902,43.225) 53.01,43.117 ccw(c52.902,43.225) 53.01,43.333 51.998,44.345 cw(c52.106,44.453) 51.998,44.56 cw(c52.106,44.453) 52.214,44.56 52.822,43.952 ccw(c52.93,44.059) 53.038,43.952 ccw(c52.93,44.059) 53.038,44.167 52.62,44.585 cw(c52.728,44.693) 52.62,44.801 52.952,45.133 52.952,45.479 52.952,45.833 v1(53.012,45.893)
SDQ23: U1.E11 U2.AB10 | length 21.8
  Top w0.127: v1(52.673,46.408) 52.673,46.464 52.857,46.648 52.857,48.149 52.85,48.156 52.85,48.408 52.857,48.415 52.857,48.636 U2.AB10@53.153,48.932
  Bottom w0.127: v1(51.97,36.858) 51.612,36.858 51.475,36.995 51.475,38.342 49.995,39.823 49.995,40.132 49.995,40.196 ccw(c49.843,40.196) 49.843,40.348 49.63,40.348 cw(c49.63,40.5) 49.63,40.653 50.258,40.653 ccw(c50.258,40.805) 50.258,40.958 49.63,40.958 cw(c49.63,41.11) 49.63,41.262 50.258,41.262 ccw(c50.258,41.415) 50.258,41.567 49.63,41.567 cw(c49.63,41.72) 49.63,41.872 50.456,41.872 ccw(c50.456,42.024) 50.456,42.177 50.147,42.177 cw(c50.147,42.329) 49.995,42.329 49.995,42.692 49.995,42.878 50.362,43.245 50.406,43.29 ccw(c50.299,43.397) 50.406,43.505 50.209,43.703 cw(c50.316,43.811) 50.209,43.919 cw(c50.316,43.811) 50.424,43.919 50.813,43.53 ccw(c50.92,43.638) 51.028,43.53 ccw(c50.92,43.638) 51.028,43.746 50.64,44.134 cw(c50.747,44.242) 50.64,44.35 cw(c50.747,44.242) 50.855,44.35 51.053,44.152 ccw(c51.161,44.259) 51.269,44.152 51.515,44.398 52.62,45.504 52.62,46.356 v1(52.673,46.408)
SDQ24: U1.C8 U2.Y1 | length 26.2
  Top w0.127: U2.Y1@47.303,50.232 47.293,50.242 45.093,50.242 44.112,49.261 44.112,34.481 45.273,33.321 50.29,33.321 50.584,33.615 U1.C8@50.584,34.366
SDQ25: U1.B8 U2.Y2 | length 26.2
  Top w0.127: U2.Y2@47.953,50.232 48.12,50.065 48.12,49.96 48.046,49.886 45.208,49.886 44.412,49.089 44.412,34.707 45.53,33.589 50.115,33.589 50.292,33.766 50.292,34.274 50.218,34.349 49.956,34.349 U1.B8@49.929,34.376 ; U1.B8@49.911,34.343 U1.B8@49.934,34.366
SDQ26: U1.C9 U2.AA1 | length 25.9
  Top w0.127: U2.AA1@47.303,49.582 45.555,49.582 44.818,48.845 44.818,34.891 44.889,34.819 44.934,34.775 45.059,34.65 ccw(c45.167,34.757) 45.275,34.65 45.536,34.91 cw(c45.643,34.802) 45.751,34.91 cw(c45.643,34.802) 45.751,34.695 45.49,34.434 ccw(c45.598,34.326) 45.49,34.219 45.706,34.003 45.751,33.958 45.78,33.929 45.865,33.929 46.393,33.929 ccw(c46.393,34.081) 46.545,34.081 46.545,34.384 cw(c46.698,34.384) 46.85,34.384 46.85,34.081 ccw(c47.003,34.081) 47.003,33.929 47.371,33.929 49.34,33.929 49.626,34.215 49.626,34.501 49.804,34.679 50.055,34.679 50.064,34.669 50.29,34.669 50.302,34.681 50.481,34.681 50.599,34.798 50.673,34.872 50.673,35.041 50.58,35.134 U1.C9@50.58,35.176
SDQ27: U1.B9 U2.AA2 | length 26
  Top w0.127: U2.AA2@47.953,49.582 47.647,49.276 45.874,49.276 45.286,48.688 45.286,38.481 45.286,38.028 ccw(c45.438,38.028) 45.438,37.876 45.885,37.876 cw(c45.885,37.723) 45.885,37.571 45.197,37.571 ccw(c45.197,37.418) 45.197,37.266 45.885,37.266 cw(c45.885,37.114) 45.885,36.961 45.197,36.961 ccw(c45.197,36.809) 45.197,36.656 45.885,36.656 cw(c45.885,36.504) 45.885,36.352 45.438,36.352 ccw(c45.438,36.199) 45.286,36.199 45.286,35.831 45.286,35.696 46.219,34.763 46.828,34.763 46.941,34.876 48.271,34.876 48.348,34.798 49.566,34.798 U1.B9@49.934,35.166
SDQ28: U1.B10 U2.AC2 | length 26
  Top w0.102: 48.716,36.288 48.724,36.279 49.621,36.279 U1.B10@49.934,35.966
  Top w0.127: U2.AC2@47.953,48.282 47.191,47.52 47.191,43.053 47.191,42.578 ccw(c47.356,42.578) 47.356,42.413 47.647,42.413 cw(c47.647,42.248) 47.647,42.082 47.356,42.082 ccw(c47.356,41.917) 47.191,41.917 47.191,41.524 47.191,41.399 47.191,41.116 cw(c47.026,41.116) 47.026,40.95 46.455,40.95 ccw(c46.455,40.785) 46.455,40.62 47.647,40.62 cw(c47.647,40.455) 47.647,40.29 46.455,40.29 ccw(c46.455,40.125) 46.455,39.96 47.647,39.96 cw(c47.647,39.795) 47.647,39.63 46.455,39.63 ccw(c46.455,39.465) 46.455,39.299 47.647,39.299 cw(c47.647,39.134) 47.647,38.969 46.792,38.969 ccw(c46.792,38.804) 46.792,38.639 47.614,38.639 cw(c47.614,38.474) 47.614,38.309 47.356,38.309 ccw(c47.356,38.144) 47.191,38.144 47.191,37.75 47.191,36.898 47.513,36.576 48.036,36.576 48.324,36.288 48.716,36.288